# Altium PCB WDUExtensionBoard_v2.PcbDoc
Units mil, origin at the board's own origin, x right, y up, seen from the top; angles counter-clockwise.
Board outline 3818.9 x 866.14 mil, 2 copper layers (Top Layer, Bottom Layer); 38 components, 42 nets, 145 pads, 27 vias.
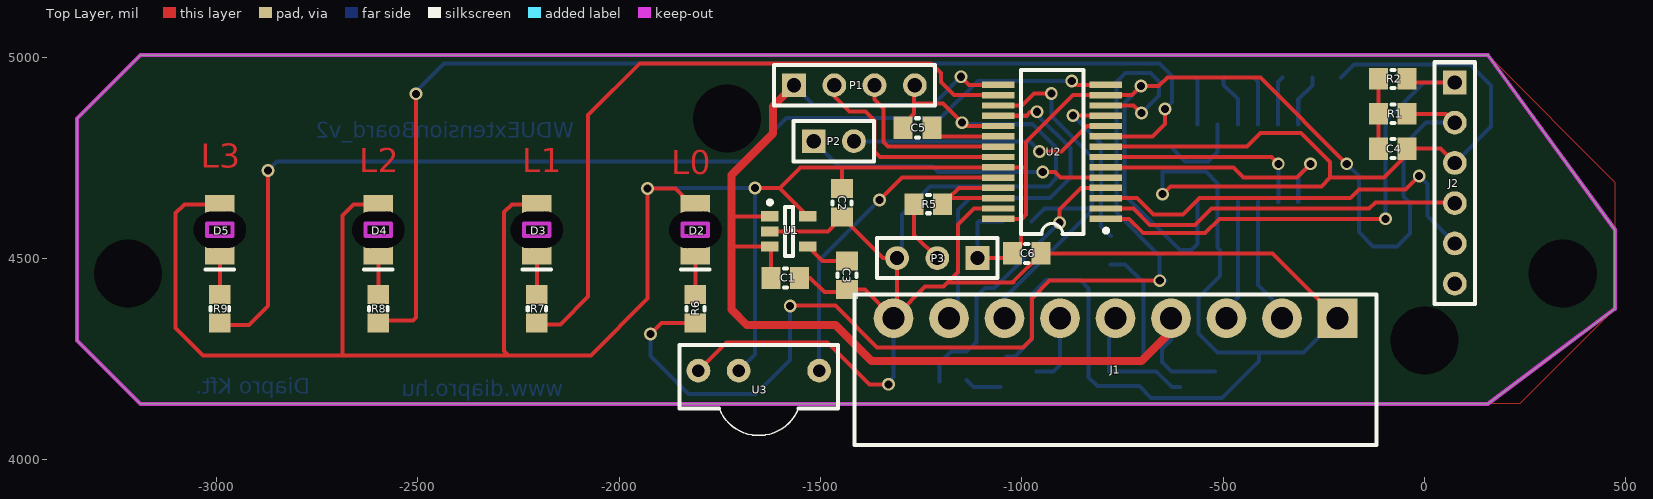
[diagram p0: Top Layer view]
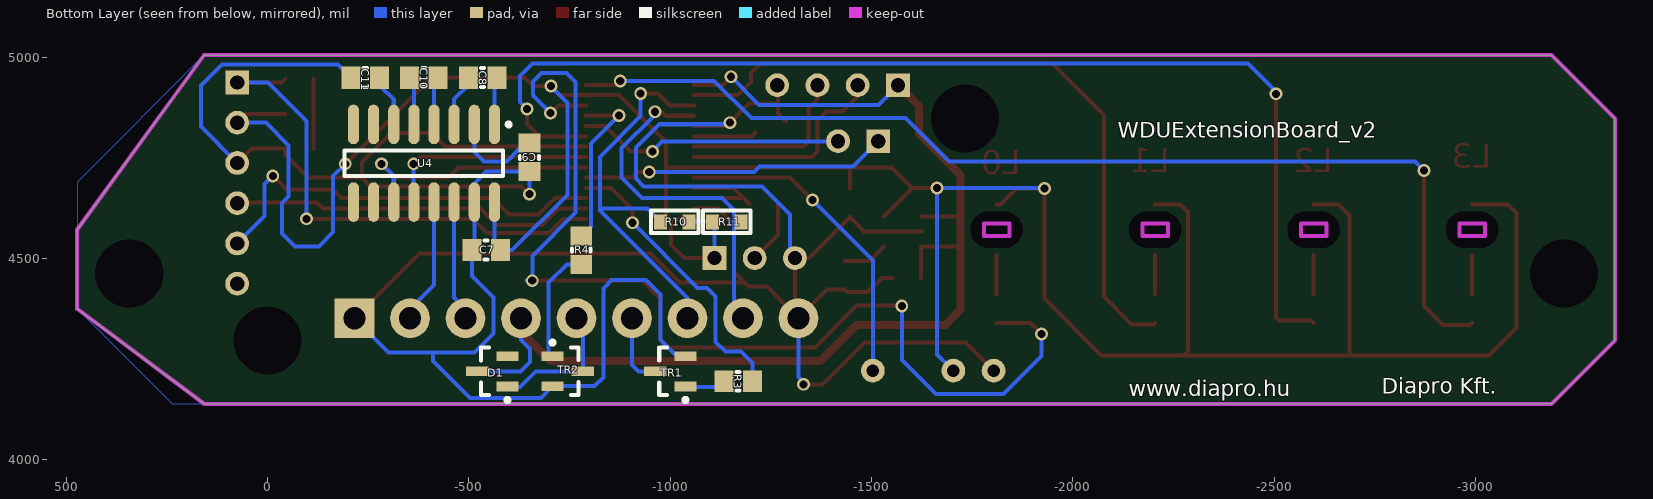
[diagram p1: Bottom Layer view, seen from below]

## Layer stack, top to bottom
Top Layer: signal copper 1.4
Dielectric: dielectric 12.6, FR-4, Dk 4.8
Bottom Layer: signal copper 1.4

## Board outline
-3346.46,4296.18 -3346.46,4847.36 -3188.98,5004.84 157.48,5004.84 472.44,4571.77 472.44,4374.92 157.48,4138.7 -3188.98,4138.7

## Design rules (kind name [scope] priority, off if disabled: settings)
AssemblyTestPointUsage [All] p1: valid=2
Clearance [Not OnLayer('Keep-Out Layer') vs Not OnLayer('Keep-Out Layer')] p1: gap=10
ComponentClearance [All] p1: gap=0 collisioncheckmode=3 verticalgap=10 showdistances=TRUE
FabricationTestpoint [All] p1 off: side=3 testpointundercomponent=TRUE minsize=40 maxsize=100 preferedsize=60 minholesize=0 maxholesize=40 preferedholesize=32 testpointgrid=1 allowsidetop=TRUE allowsidebottom=TRUE usegrid=TRUE gridtolerance=0.01
HoleSize [All] p1: absolutevalues=TRUE maxlimit=141.73 minlimit=1 maxpercent=80.000 minpercent=20.000
MinimumSolderMaskSliver [All] p1: minsoldermaskwidth=0
PolygonConnect [All] p1: connectstyle=Relief reliefconductorwidth=10 reliefentries=4 polygonreliefangle="90 Angle"
RoutingVias [All] p1: holewidth=10 width=30 viastyle="Through Hole" minholewidth=10 minwidth=30 maxholewidth=100 maxwidth=100
SilkToSilkClearance [All] p1: silktosilkclearance=0
SilkscreenOverComponentPads [IsPad] p1: minsilkscreentomaskgap=0
SolderMaskExpansion [All] p1: expansion=4
Width [All] p1: maxlimit=30 minlimit=10 preferedwidth=10
21 further rules are at their usual default settings.

## Components (designator, comment, footprint, x,y, rotation, side; value= is the part's Value field where it differs from the comment)
C1 "1uF" "0805 CAP" -1587.4,4451.69 r180 top
C2 "1uF" "0805 CAP" -1446.85,4637.91 r90 top
C3 "100nF" "0805 CAP" -1434.65,4457.99 r90 top
C4 "100nF" "0805 CAP" -78.74,4772.56 r180 top
C5 "10uF" "0805 CAP" -1259.45,4824.41 r180 top
C6 "100nF" "0805 CAP" -988.19,4512.72 r180 top
C7 "100nF" "0805 CAP" -543.31,4520.59 r0 bottom
C8 "100nF" "0805 CAP" -534.57,4948.86 r180 bottom
C9 "100nF" "0805 CAP" -651.18,4750.79 r270 bottom
C10 "100nF" "0805 CAP" -388.9,4948.86 r0 bottom
C11 "100nF" "0805 CAP" -243.23,4948.86 r0 bottom
D1 "BAV99" SOT23 -558.66,4219.29 r0 bottom
D2 "LED 0" "1206 LED Reversed" -1811.02,4571.14 r90 top
D3 "LED 1" "1206 LED Reversed" -2204.72,4571.14 r90 top
D4 "LED 2" "1206 LED Reversed" -2598.43,4571.14 r90 top
D5 "LED 3" "1206 LED Reversed" -2992.13,4571.14 r90 top
J1 "OUTPUT" "Euroblock 3.5pitch 9P" -216.54,4351.3 r180 top
J2 "PIC_Kit" HDR1X6 74.8,4937.13 r270 top
P1 "USB" HDR1X4 -1566.14,4930.04 r0 top
P2 "Watchdog" HDR1X2 -1517.32,4791.06 r0 top
P3 "Ext" HDR1X3 -1110.24,4500.91 r180 top
R1 "10K" "0805 RES" -78.74,4859.17 r0 top
R2 "100" "0805 RES" -78.74,4945.79 r180 top
R3 "10K" "0805 RES" -1168.9,4194.88 r180 bottom
R4 "10K" "0805 RES" -779.53,4520.59 r90 bottom
R5 "100" "0805 RES" -1232.28,4634.76 r0 top
R6 "330" "0805 RES" -1811.02,4374.92 r270 top
R7 "330" "0805 RES" -2204.72,4374.92 r270 top
R8 "330" "0805 RES" -2598.43,4374.92 r270 top
R9 "330" "0805 RES" -2992.13,4374.92 r270 top
R10 "10k" FP_0603_RES -1011.81,4590.94 r0 bottom
R11 "10k" FP_0603_RES -1140.94,4590.94 r180 bottom
TR1 "BC846" SOT23 -1000.79,4219.29 r0 bottom
TR2 "BC846" SOT23 -745.67,4220.08 r180 bottom
U1 "LP3985IM5-3.3" MF05A_N -1578.74,4567.05 r0 top
U2 "PIC24FJ64GB002-I/SO" SSOP-28 -925.2,4764.69 r90 top
U3 "TSOP1736" TSOP17xx -1653.54,4221.38 r0 top
U4 "MAX3232CSE" NSO16_M -388.9,4736.26 r270 bottom

## Footprints (in the part's own frame and the unit in brackets; to place one, negate y for a bottom-side part, rotate by r counter-clockwise, add the part's x,y. Pads: shape width x height; smd on the part's side, far side on the other; paste and mask are expansions set on the pad)
"0805 CAP" [mm] "Chip Capacitor, 2-Leads, Body 2,0x1,3mm, IPC Medium Density"
  rect 1.2x1.4 smd: 1(-0.9,0) 2(0.9,0)
  silkscreen extent -0.1,-0.6 0.1,0.6, body extent -1.05,-0.67 1.05,0.67, height 1
"0805 RES" [mm] "Chip Resistor, 2-Leads, Body 2,0x1,3mm, IPC Medium Density"
  rect 1.2x1.35 smd: 1(-0.9,0) 2(0.9,0)
  silkscreen extent -0.1,-0.58 0.1,0.58, body extent -1.05,-0.67 1.05,0.67, height 1
"1206 LED Reversed" [mm] "1206 Green LED"
  rect 1.2x1.85 smd: 1(1.6,0) 2(-1.6,0)
  Keep-Out Layer lines w0.254: -0.4,0.8 -0.4,-0.8 0.4,-0.8 0.4,0.8 -0.4,0.8
  silkscreen extent -2.5,-0.9 -2.5,0.9, body extent -1.6,-0.8 1.6,0.8, height 0.5
"Euroblock 3.5pitch 9P" [mm] "3.5 mm pitch 9P connector"
  rect 2.5x2.5 hole 1.4: 1(0,0)
  round 2.5 hole 1.4 mask+0.102: 2(3.5,0) 3(7,0) 4(10.5,0) 5(14,0) 6(17.5,0) 7(21,0) 8(24.5,0) 9(28,0)
  silkscreen extent -2.45,-1.5 30.45,8, body extent -2.45,-1.5 30.45,8, height 7.2
FP_0603_RES [mm] "0603 ellenállás"
  rect 0.8x0.95 smd: 1(-0.9,0) 2(0.9,0)
  silkscreen extent -1.5,-0.7 1.5,0.7, body extent -0.8,-0.4 0.8,0.4, height 0.44
HDR1X2 [mm] "Connector; Header; 2 Position"
  rect 1.5x1.5 hole 0.9: 1(0,0)
  round 1.5 hole 0.9: 2(2.54,0)
  silkscreen extent -1.27,-1.27 3.81,1.27
HDR1X3 [mm] "Connector; Header; 3 Position"
  rect 1.5x1.5 hole 0.9: 1(0,0)
  round 1.5 hole 0.9: 2(2.54,0) 3(5.08,0)
  silkscreen extent -1.27,-1.27 6.35,1.27
HDR1X4 [mm] "Connector; Header; 4 Position"
  rect 1.5x1.5 hole 0.9: 1(0,0)
  round 1.5 hole 0.9: 2(2.54,0) 3(5.08,0) 4(7.62,0)
  silkscreen extent -1.27,-1.27 8.89,1.27
HDR1X6 [mm] "Connector; Header; 6 Position"
  rect 1.5x1.5 hole 0.9: 1(0,0)
  round 1.5 hole 0.9: 2(2.54,0) 3(5.08,0) 4(7.62,0) 5(10.16,0) 6(12.7,0)
  silkscreen extent -1.27,-1.27 13.97,1.27
MF05A_N [mm] "SOT23, 5-Leads, Body 2.9x1.6mm, Pitch 0.95mm, Lead Span 2.8mm, IPC Medium Density"
  rect 1.1x0.65 smd: 1(-1.2,0.95) 2(-1.2,0) 3(-1.2,-0.95) 4(1.2,-0.95) 5(1.2,0.95)
  silkscreen extent -1.32,-1.55 0.25,1.95, body extent -0.9,-1.55 0.9,1.55, height 1.19
NSO16_M [mm] "SOIC, 16-Leads, Body 9.9x3.9mm, Pitch 1.27mm, IPC Low Density"
  oval 2.5x0.7 smd: 1(-2.45,4.445) 2(-2.45,3.175) 3(-2.45,1.905) 4(-2.45,0.635) 5(-2.45,-0.635) 6(-2.45,-1.905) 7(-2.45,-3.175) 8(-2.45,-4.445) 9(2.45,-4.445) 10(2.45,-3.175) 11(2.45,-1.905) 12(2.45,-0.635) 13(2.45,0.635) 14(2.45,1.905) 15(2.45,3.175) 16(2.45,4.445)
  silkscreen extent -2.57,-5 0.8,5.47, body extent -2,-5 2,5, height 1.75
SOT23 [mm] "SOT23, 3-Leads, Body 3,0x2,5mm (max), Pitch 0,95mm, IPC Medium Density"
  rect 1.4x0.6 smd: 1(-0.95,0.95) 2(-0.95,-0.95) 3(0.95,0)
  silkscreen extent -1.07,-1.5 0.7,1.92, body extent -0.7,-1.5 0.7,1.5, height 1.1
SSOP-28 [mm] "SSOP, Plastic; 28 Leads; Body Width 5.2 mm; Pitch 0.65 mm"
  rect 0.4x2.05 smd: 1(-4.225,-3.4) 2(-3.575,-3.4) 3(-2.925,-3.4) 4(-2.275,-3.4) 5(-1.625,-3.4) 6(-0.975,-3.4) 7(-0.325,-3.4) 8(0.325,-3.4) 9(0.975,-3.4) 10(1.625,-3.4) 11(2.275,-3.4) 12(2.925,-3.4) 13(3.575,-3.4) 14(4.225,-3.4) 15(4.225,3.4) 16(3.575,3.4) 17(2.925,3.4) 18(2.275,3.4) 19(1.625,3.4) 20(0.975,3.4) 21(0.325,3.4) 22(-0.325,3.4) 23(-0.975,3.4) 24(-1.625,3.4) 25(-2.275,3.4) 26(-2.925,3.4) 27(-3.575,3.4) 28(-4.225,3.4)
  silkscreen extent -5.18,-3.52 5.17,1.98, body extent -5.1,-2.7 5.1,2.7, height 2
TSOP17xx [mm] "TSOP17xx IR Receiver"
  round 1.5 hole 0.8: 1(-3.81,0) 2(-1.27,0) 3(3.81,0)
  silkscreen extent -5,-4.09 5,1.6, body extent -5,-4.1 5,1.6, height 13.3

## Part data
C1 C2 C3 C4 C5 C6 C7 C8 C9 C10 C11: library part CAP, "Capacitor"
D1: "Dual Schottky series - 0.2A, 75V"
D2 D3 D4 D5: library part LED2, "Typical RED, GREEN, YELLOW, AMBER GaAs LED"
J1: library part "Euroblock 9P connector"
J2: "PIC Kit connector"
P1: library part "Header 4", "Header, 4-Pin"
P2: library part "Header 2", "Header, 2-Pin"
P3: library part "Header 3", "Header, 3-Pin"
R1 R2 R3 R4 R5 R6 R7 R8 R9: library part RES, "Resistor"
R10 R11: library part Res3, "Resistor"
TR1 TR2: "NPN Transistor, 80 V, SOT23"
U1: "Micropower, 150mA Low-Noise Ultra Low-Dropout CMOS Voltage Regulator"
U2: "16-Bit Flash Microcontroller with USB On-The-Go and nanoWatt XLP, 64KB Flash, 8KB SRAM, 28-Pin SOIC, Industrial Temperature"
U3: library part TSOP17xx, "IR Receiver, 3-Pin"
U4: "3.0V TO 5.5V, Low-Power, up to 1Mbps, True RS-232 Transceiver Using Four 0.1µF External Capacitor"

## Free pads (board coordinates)
  round 60 hole 169.29: 0(-3220.08,4462.32) 0(-1732.28,4847.36) 0(0,4296.18) 0(342.91,4462.32)
  oct 78.74x60 hole 90.55 slot 129.92 at 0.7 deg unplated: 0(-2992.13,4571.14) 0(-2598.43,4571.14) 0(-2204.72,4571.14) 0(-1811.02,4571.14)

## Via types
v1: diameter 32, hole 20, Top Layer to Bottom Layer, 27 vias

## Nets (pads, with @x,y where several pads share a name; then routed paths per layer and width w, separated by ;. In a path a pad name is that pad's centre, name@x,y a point inside that pad or via, vN(x,y) a via of type N, cw(c..) or ccw(c..) an arc to the next point about the centre after c; other vN are vias at no path point)
D+: P1.3 U2.21 | length 439.8
  Top Layer w10: P1.3 -1366.14,4894.61 -1343.7,4872.17 -1343.7,4788.98 -1332.2,4777.48 U2.21
D-: P1.2 U2.22 | length 542.5
  Top Layer w10: P1.2 -1466.14,4901.69 -1428.69,4864.24 -1388.14,4864.24 -1366.54,4842.64 -1366.54,4765.75 -1352.68,4751.89 U2.22
DAT: P3.2 R5.1 | length 157.7
  Top Layer w10: R5.1 -1267.72,4558.39 P3.2
GND: C1.1 C2.1 C3.1 C4.1 C5.2 C6.1 C7.2 C9.2 C11.2 J1.1 J1.9 J2.3 P1.4 P3.3 TR1.2 TR2.2 U1.2 U2.8 U2.19 U2.27 U3.1 U4.15 | length 8375.4
  Top Layer w10: U3.1 -1733.19,4291.73 -1483.46,4291.73 -1379.13,4187.4 v1(-1331.5,4187.4) ; U1.2 -1482.28,4567.05 C2.1 -1345.28,4500.91 P3.3 J1.9@-1310.24,4359.96 ; C1.1 -1526.1,4451.69 -1490.94,4416.54 -1440.67,4416.54 C3.1 -1390.16,4422.56 J1.9 J1.9@-1310.24,4359.96 ; C5.2@-1287.4,4840.16 -1267.72,4859.84 -1267.72,4884.65 ; P1.4 -1267.72,4928.46 -1267.72,4884.65 ; U2.27 -1119.37,4623.94 -1159.45,4583.86 -1159.45,4465.75 -1185.43,4439.76 ; U2.19 -1139.69,4828.66 -1195.67,4884.65 -1267.72,4884.65 ; U2.8 -441.02,4777.48 -407.48,4811.02 -307.09,4811.02 -235.43,4739.37 -235.43,4700.39 ; v1(-651.18,4659.45) -631.5,4679.13 -256.69,4679.13 -235.43,4700.39 ; J1.1 -377.95,4512.72 C6.1 -952.76,4511.19 -1021.65,4442.29 -1021.65,4439.76 -1185.43,4439.76 ; J2.3 39.37,4772.56 C4.1 -43.31,4757.87 -100.79,4700.39 -235.43,4700.39 ; J1.9@-1310.24,4359.96 -1240.28,4429.92 -1195.28,4429.92 -1185.43,4439.76
  Bottom Layer w10: v1@-1338.19,4186.22 -1318.9,4205.51 J1.9 ; P3.3 -1298.43,4512.72 -1298.43,4609.06 -1228.35,4679.13 -934.25,4679.13 -915.52,4697.87 -915.52,4774.97 -973.72,4833.17 -1144.98,4833.17 v1(-1148.82,4837.01) ; TR1.2 -1017.32,4256.69 -976.38,4297.64 -976.38,4409.84 -940.16,4446.06 -855.12,4446.06 -834.25,4425.2 -834.25,4204.72 -812.2,4182.68 TR2.2 -679.13,4153.54 -503.15,4153.54 -411.02,4245.67 -411.02,4266.54 ; v1(-651.18,4659.45) C9.2 -543.31,4715.35 -513.9,4685.94 U4.15 -513.9,4526.61 C7.2 -507.87,4456.3 -561.42,4402.76 -561.42,4313.39 -514.57,4266.54 -411.02,4266.54 ; J1.1 -301.3,4266.54 -411.02,4266.54 ; C11.2 -175,4981.65 113.23,4981.65 164.96,4929.92 164.96,4827.28 J2.3
I2C_CLK: J1.7 R10.2 U2.17 | length 1000.8
  Top Layer w10: U2.17 -1000.08,4879.84 -970.08,4909.84 v1(-927.17,4909.84)
  Bottom Layer w10: J1.7 -1043.31,4401.18 -825.98,4618.5 ; R10.2@-976.38,4591.73 -944.09,4624.02 -831.5,4624.02 -825.98,4618.5 ; v1(-927.17,4909.84) -927.17,4853.54 -825.98,4752.36 -825.98,4618.5
I2C_DAT: J1.8 R11.2 U2.18 | length 890.8
  Top Layer w10: U2.18 -988.66,4854.25 -979.53,4863.39 v1@-961.81,4863.39
  Bottom Layer w10: J1.8 -1159.45,4372.95 -1159.45,4619.69 -1129.13,4650 -930.31,4650 -879.92,4700.39 -879.92,4773.62 -957.48,4851.18 v1@-957.48,4867.72
  other v1: -962.6,4864.17
"INFRA IN": U2.24 U3.3 | length 803.3
  Top Layer w10: v1(-1353.46,4645) -1297.76,4700.71 U2.24
  Bottom Layer w10: U3.3 -1503.54,4494.92 v1(-1353.46,4645)
IR: R3.2 U2.4 | length 723.7
  Top Layer w10: v1(-906.69,4588.58) -906.69,4621.77 -853.35,4675.12 U2.4
  Bottom Layer w10: R3.2 -1204.33,4240.55 -1176.26,4268.62 -1137.8,4268.62 -1113.46,4292.95 -1113.46,4405 -1091.69,4426.77 -1068.5,4426.77 v1(-906.69,4588.58)
IR_OUT: J1.6 TR1.3 | length 204
  Bottom Layer w10: TR1.3 -921.65,4219.29 -905.51,4235.43 J1.6 J1.6@-905.51,4374.92
LED_0: R6.2 U2.12 | length 2690.5
  Top Layer w10: v1(-1922.53,4311.84) -1894.88,4339.49 R6.2 ; v1(-1575.59,4382.17) -1575.59,4383.19 -1463.39,4383.19 -1359.45,4279.25 -997.64,4279.25 -975.59,4301.3 -975.59,4400.12 -931.1,4444.61 v1(-657.87,4444.61) ; U2.12 -722.76,4879.84 v1(-703.54,4860.63)
  Bottom Layer w10: v1(-1922.53,4311.84) -1922.53,4257.69 -1828.35,4163.5 -1660.24,4163.5 -1575.59,4248.15 v1(-1575.59,4382.17) ; v1(-703.54,4860.63) -659.45,4904.72 -659.45,4939.76 -680.71,4961.02 -742.91,4961.02 -765.35,4938.58 -765.35,4613.79 -657.87,4506.31 v1(-657.87,4444.61) v1@-643.31,4444.61
LED_1: R7.2 U2.16 | length 1724.5
  Top Layer w10: R7.2 -2201.57,4336.34 -2146.46,4336.34 -2077.17,4405.63 -2077.17,4856.02 -1949.21,4983.98 -1225.32,4983.98 -1201.57,4960.24 -1201.57,4938.19 -1168.82,4905.43 U2.16
LED_2: R8.2 U2.9 | length 2868.6
  Top Layer w10: R8.2 -2591.73,4346.18 -2512.2,4346.18 -2505.12,4353.27 v1(-2505.12,4908.78) ; U2.9 -675.67,4803.07 -644.88,4833.86 v1(-644.88,4870.87)
  Bottom Layer w10: v1(-2505.12,4908.78) -2508.27,4908.78 -2508.27,4910.75 -2435.43,4983.58 -658.39,4983.58 -627.56,4952.76 -627.56,4888.19 v1(-644.88,4870.87)
LED_3: R9.2 U2.14 | length 2660.5
  Top Layer w10: R9.2 -2987.01,4334.37 -2920.08,4334.37 -2872.05,4382.4 -2872.05,4719.02 v1(-2872.83,4718.23) ; v1@-878.74,4939.37 -870.39,4931.02 U2.14
  Bottom Layer w10: v1(-2872.83,4718.23) -2872.83,4717.44 -2850,4740.28 -1692.4,4740.28 -1584.25,4848.43 -1201.97,4848.43 -1109.45,4940.94 v1(-876.38,4940.94)
M\C\L\R\: J2.1 R2.1 U2.1 | length 1300
  Top Layer w10: U2.1 -734.17,4598.35 -698.82,4562.99 -545.28,4562.99 -509.92,4598.35 v1(-96.81,4598.35) ; R2.1 -34.65,4937.13 J2.1
  Bottom Layer w10: v1(-96.81,4598.35) -96.81,4841.65 -1.34,4937.13 J2.1
NetC3_2: C3.2 U1.4 | length 111.9
  Top Layer w10: U1.4 -1495.28,4493.43 C3.2
NetC4_2: C4.2 R1.1 R2.2 | length 173.2
  Top Layer w10: C4.2 R2.2
NetC5_1: C5.1 U2.20 | length 156.9
  Top Layer w10: C5.1@-1212.07,4812.46 -1202.68,4803.07 U2.20
NetC8_1: C8.1 U4.3 | length 130.7
  Bottom Layer w10: C8.1 -499.13,4930.67 -463.9,4895.43 U4.3
NetC8_2: C8.2 U4.1 | length 118.7
  Bottom Layer w10: C8.2 -563.9,4942.76 U4.1
NetC9_1: C9.1 U4.2 | length 201.3
  Bottom Layer w10: C9.1@-624.8,4771.26 -594.61,4741.06 -537.4,4741.06 -513.9,4764.57 U4.2
NetC10_1: C10.1 U4.4 | length 120.5
  Bottom Layer w10: C10.1 -413.9,4938.43 U4.4
NetC10_2: C10.2 U4.5 | length 120.5
  Bottom Layer w10: U4.5 -363.9,4938.43 C10.2
NetC11_1: C11.1 U4.6 | length 130.7
  Bottom Layer w10: U4.6 -313.9,4894.57 -278.66,4929.8 C11.1
NetD2_2: D2.2 R6.1 | length 97.8
  Top Layer w10: R6.1 D2.2
NetD3_2: D3.2 R7.1 | length 97.8
  Top Layer w10: R7.1 D3.2
NetD4_2: D4.2 R8.1 | length 97.8
  Top Layer w10: R8.1 D4.2
NetD5_2: D5.2 R9.1 | length 97.8
  Top Layer w10: R9.1 D5.2
NetR3_1: R3.1 TR1.1 | length 92.1
  Bottom Layer w10: R3.1@-1137.8,4197.76 -1120.35,4180.31 TR1.1@-1052.87,4180.31
NetR4_1: R4.1 TR2.1 | length 282.7
  Bottom Layer w10: R4.1 -743.62,4485.16 -698.46,4440 TR2.1@-698.46,4257.09
NetR5_2: R5.2 U2.25 U2.26 | length 277.5
  Top Layer w10: R5.2 R5.2@-1182.09,4649.53 ; U2.26 R5.2@-1182.09,4649.53 ; U2.25 -1156.5,4675.12 R5.2@-1182.09,4649.53
PGEC: J2.5 U2.3 | length 1039.1
  Top Layer w10: U2.3 -714.09,4649.53 -673.23,4608.66 -599.61,4608.66 -558.74,4649.53 -184.72,4649.53 -163.01,4671.24 -47.22,4671.24 v1(-13.46,4705)
  Bottom Layer w10: v1(-13.46,4705) 6.54,4685 6.54,4605.39 J2.5
PGED: J2.4 U2.2 | length 907
  Top Layer w10: U2.2 -723.15,4623.94 -682.68,4583.46 -569.69,4583.46 -529.21,4623.94 -137.87,4623.94 -122.44,4639.37 72.56,4639.37 J2.4
REL: R4.2 U2.11 | length 419.4
  Top Layer w10: v1(-872.83,4855) -792.09,4855 U2.11
  Bottom Layer w10: v1(-872.83,4855) -803.15,4785.31 -803.15,4579.65 R4.2
REL_OUT: D1.1 J1.5 TR2.3 | length 354
  Bottom Layer w10: J1.5@-767.72,4374.92 -783.46,4359.17 -783.46,4218.9 -666.54,4218.9 -627.95,4180.31 D1.1@-607.99,4180.31
RXD: U2.7 U4.12 | length 530.2
  Top Layer w10: U2.7 -380.35,4751.89 v1(-363.46,4735)
  Bottom Layer w10: U4.12 -363.46,4640.24 v1(-363.46,4735)
RXDH_2: J1.2 U4.13 | length 289.6
  Bottom Layer w10: U4.13 -413.9,4434.49 J1.2@-354.33,4374.92
TXD: U2.6 U4.11 | length 640.1
  Top Layer w10: U2.6 -474.76,4726.3 -449.65,4701.18 -317.28,4701.18 v1(-283.46,4735)
  Bottom Layer w10: U4.11 -313.9,4704.57 v1(-283.46,4735)
TXDH_3: J1.3 U4.14 | length 276.6
  Bottom Layer w10: J1.3@-492.13,4374.92 -463.9,4403.15 U4.14
VCC3.3V: C2.2 C6.2 C7.1 D2.1 D3.1 D4.1 D5.1 J2.2 P3.1 R1.2 R10.1 R11.1 U1.5 U2.13 U2.23 U2.28 U3.2 U4.16 | length 7569
  Top Layer w10: D5.1 -3079.76,4634.13 -3101.57,4612.32 -3101.57,4327.28 -3033.46,4259.17 -2687.01,4259.17 ; D4.1 -2659.69,4634.13 -2687.01,4606.81 -2687.01,4259.17 ; D3.1 -2266.77,4634.13 -2285.83,4615.08 -2285.83,4269.8 -2275.2,4259.17 ; D2.1 -1820.63,4634.13 -1860.24,4673.74 v1(-1929.53,4673.74) -1929.53,4400.51 -2070.87,4259.17 -2275.2,4259.17 ; v1(-1663.46,4675) -1601.5,4675 -1550.2,4726.3 -1446.85,4726.3 ; -1601.77,4674.72 U1.5 ; C2.2 -1446.85,4726.3 ; P3.1 -1035.43,4500.91 C6.2 -1002.42,4533.92 -1002.42,4596.04 -1000.12,4598.35 ; U2.28 -1000.12,4598.35 ; -994.76,4726.3 U2.23 -1446.85,4726.3 ; v1(-193.46,4735) -408.19,4949.72 -638.78,4949.72 -660.55,4927.95 v1(-704.33,4927.95) -726.85,4905.43 U2.13 -873.03,4905.43 -929.84,4848.62 -929.84,4848.37 -969.71,4808.5 -969.96,4808.5 -989.76,4788.7 -989.76,4608.7 -1000.12,4598.35 ; R1.2 52.76,4859.17 J2.2 ; -2687.01,4259.17 -2275.2,4259.17
  Bottom Layer w10: v1(-1929.53,4673.74) -1928.27,4675 v1(-1663.46,4675) -1663.46,4261.46 U3.2 ; P3.1 -1110.24,4589.37 -1106.3,4593.31 -1104.72,4591.73 R10.1@-1047.24,4591.73 ; v1(-704.33,4927.95) -704.33,4926.74 -744.85,4886.22 -744.96,4886.22 -744.96,4657.95 -607.6,4520.59 C7.1 -563.9,4535.43 U4.16 ; v1(-193.46,4735) -163.46,4705 -163.46,4565 -128.46,4530 -68.46,4530 -36.34,4562.13 -36.34,4637.87 -52.76,4654.29 -52.76,4780.71 3.66,4837.13 J2.2
VCC5V: C1.2 D1.3 J1.4 P1.1 U1.1 U1.3 U2.15 | length 2959.7
  Top Layer w10: -1721.26,4535.16 -1715.75,4529.65 U1.3 -1622.83,4526.5 C1.2 ; -1721.26,4603.66 -1720.47,4604.45 U1.1 ; v1(-1151.18,4951.18) -1131.02,4931.02 U2.15 ; J1.4@-629.92,4318.54 J1.4 J1.4@-629.92,4374.92
  Top Layer w20: P1.1 -1618.46,4877.72 -1618.46,4810 -1721.26,4707.2 -1721.26,4603.66 -1721.26,4535.16 -1721.26,4372.8 -1683.46,4335 -1463.46,4335 -1373.46,4245 -703.46,4245 J1.4@-629.92,4318.54
  Bottom Layer w10: P1.1 -1517.13,4881.02 -1221.34,4881.02 v1(-1151.18,4951.18) ; J1.4 -629.92,4296.85 -652.36,4274.41 -652.36,4243.31 -628.35,4219.29 D1.3 ; J1.4@-629.92,4374.92 J1.4@-618.39,4374.92
WD_IN: P2.1 U2.5 | length 763.4
  Top Layer w10: v1(-948.43,4715) -918.46,4715 -904.17,4700.71 U2.5
  Bottom Layer w10: P2.1 -1454.21,4727.95 -1222.05,4727.95 -1209.09,4715 v1(-948.43,4715)
WD_OUT: P2.2 U2.10 | length 632.3
  Top Layer w10: v1(-956.3,4765.75) -901.57,4765.75 -838.66,4828.66 U2.10
  Bottom Layer w10: -1387.52,4790 -980.55,4790 v1(-956.3,4765.75)
pads on no net: D1.2 J2.6 U4.7 U4.8 U4.9 U4.10

## Polygon pours and split planes (outlines as drawn)
GND on Bottom Layer "Bottom Layer-No Net" (solid, shelved, pour order 9): 157.87,5004.3 472.44,4689.73 472.44,4570.59 472.05,4570.2 472.05,4374.63 236.42,4139 157.87,4139 157.78,4139.09 -3189.37,4139.09 -3346.46,4296.18 -3346.46,4297.76 -3346.06,4298.15 -3346.06,4847.76 -3188.98,5004.84 -3188.58,5004.84
GND on Top Layer "Bottom Layer-No Net" (solid, shelved, pour order 8): 157.87,5004.3 472.44,4689.73 472.44,4570.59 472.05,4570.2 472.05,4374.63 236.42,4139 157.87,4139 157.78,4139.09 -3189.37,4139.09 -3346.46,4296.18 -3346.46,4297.76 -3346.06,4298.15 -3346.06,4847.76 -3188.98,5004.84 -3188.58,5004.84

## Keep-outs
Keep-Out Layer:
  the board outline again, w10

## Other copper
Top Layer:
  text "L3" at -3039.37,4724.92 h60
  text "L2" at -2645.67,4713.9 h60
  text "L1" at -2240.94,4713.9 h60
  text "L0" at -1871.26,4709.57 h60
Bottom Layer:
  text "WDUExtensionBoard_v2" at -2111.81,4799.61 h39.37
  text "Diapro Kft." at -2766.93,4163.9 h39.37
  text "www.diapro.hu" at -2138.58,4157.99 h39.37

## Silkscreen, mask and mechanical layers (free items; w line width, h text height)
Bottom Overlay:
  text "WDUExtensionBoard_v2" at -2111.81,4799.61 h39.37
  text "Diapro Kft." at -2766.93,4163.9 h39.37
  text "www.diapro.hu" at -2138.58,4157.99 h39.37
Bottom Solder:
  text "WDUExtensionBoard_v2" at -2111.81,4799.61 h39.37
  text "Diapro Kft." at -2766.93,4163.9 h39.37
  text "www.diapro.hu" at -2138.58,4157.99 h39.37